# Altium PCB MiniRoverShield.PcbDoc
Units mm, origin at the board's own origin, x right, y up, seen from the top; angles counter-clockwise.
Board outline 152.4 x 101.6 mm, 2 copper layers (F.Cu, B.Cu); 33 components, 48 nets, 185 pads, 134 vias.
Unrouted connection lines stored in the file: 1.
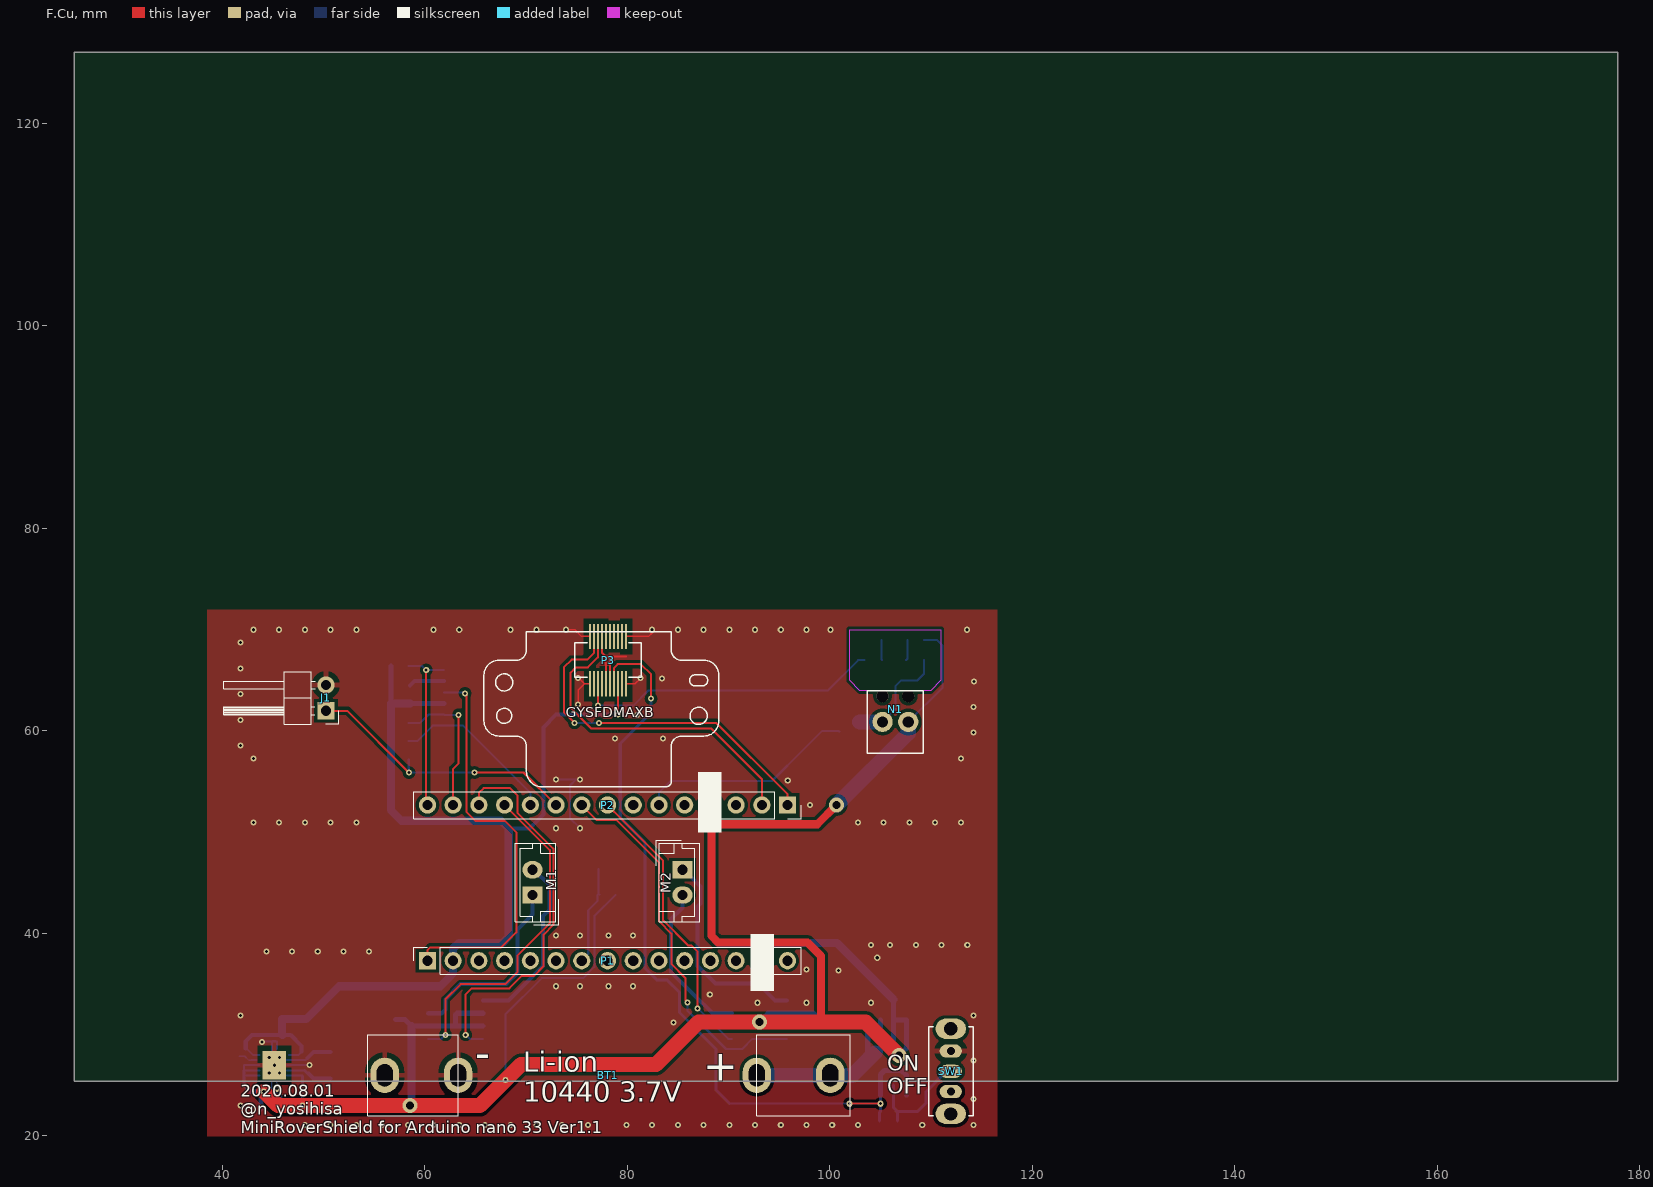
[diagram p0: F.Cu view]
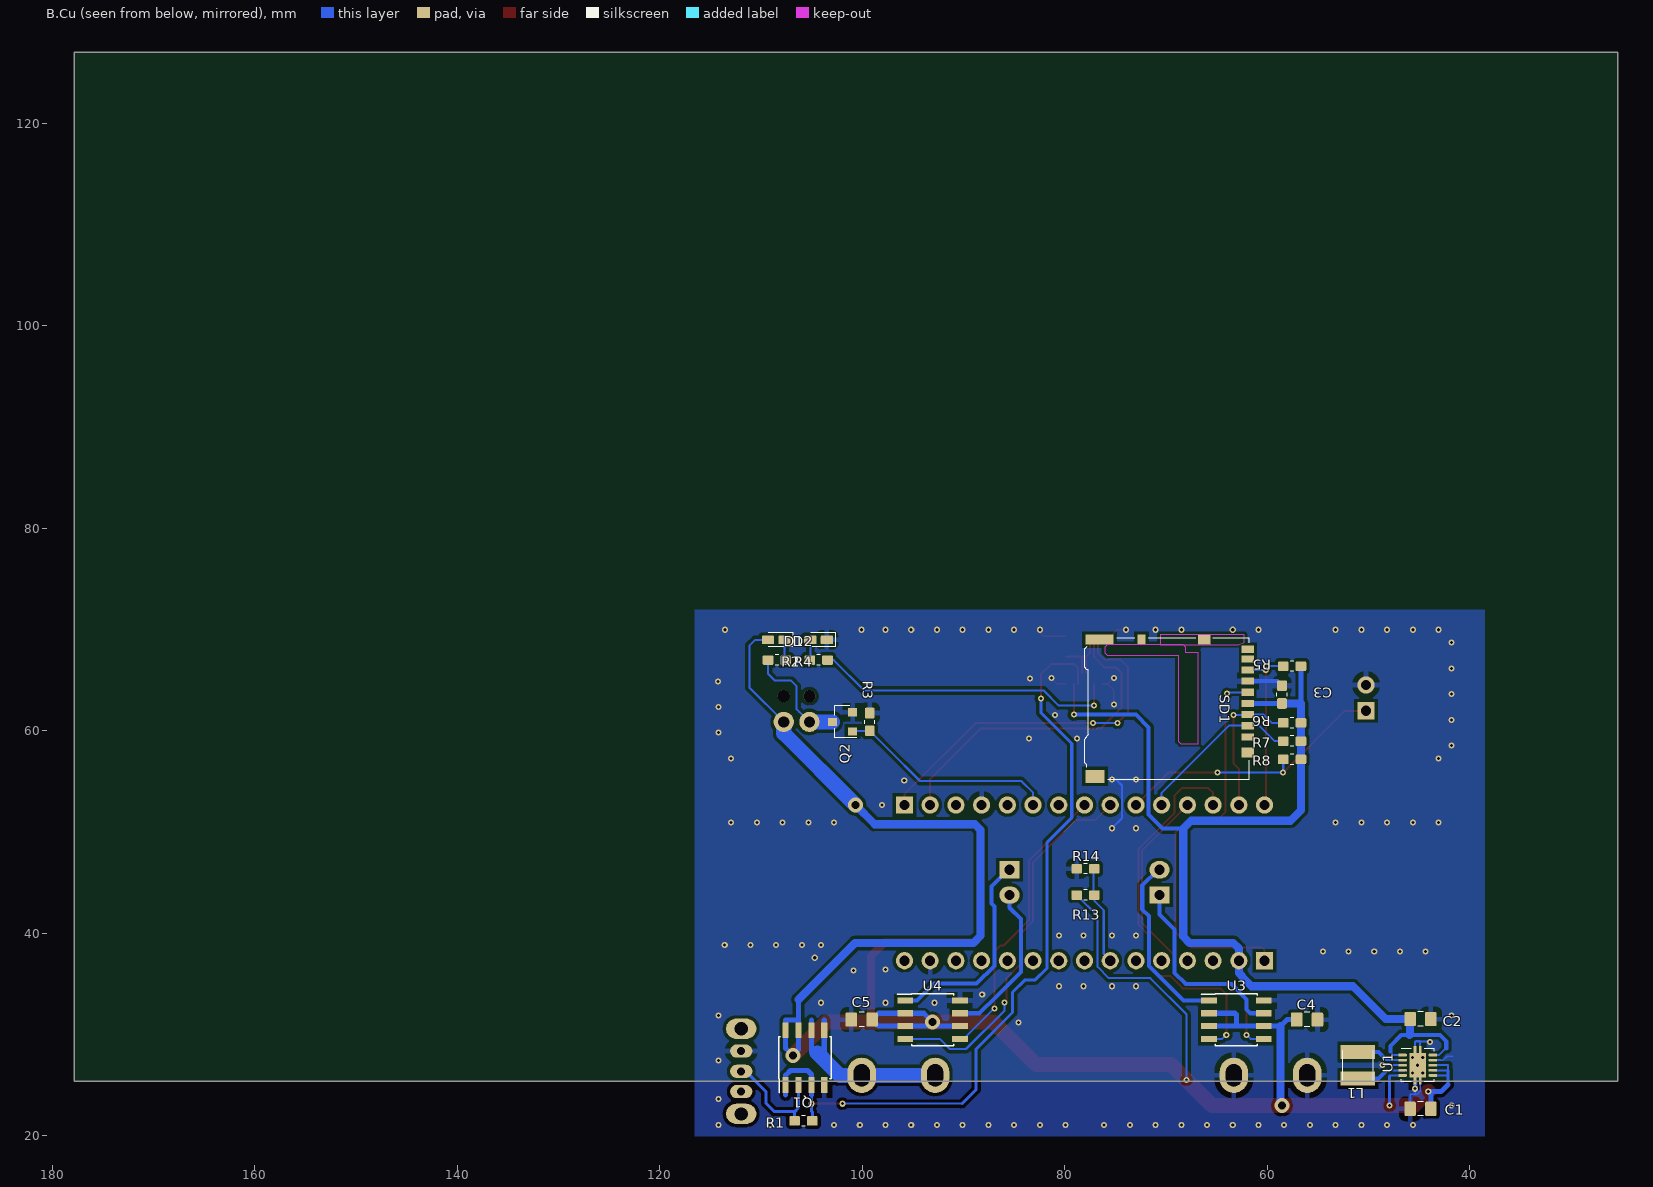
[diagram p1: B.Cu view, seen from below]

## Layer stack, top to bottom
F.Mask: solder mask 0.0102, Solder Resist, Dk 3.5
F.Cu: signal copper 0.0356
Dielectric 1: dielectric 0.32, FR-4, Dk 4.8
B.Cu: signal copper 0.0356
B.Mask: solder mask 0.0102, Solder Resist, Dk 3.5

## Board outline
25.4,25.4 177.8,25.4 177.8,127 25.4,127

## Design rules (kind name [scope] priority, off if disabled: settings)
Clearance "Clearence 0.3_NetClass" [InNetClass('Vbat')] p1: gap=0.3 ignorepadtopadclearanceinfootprint=FALSE
Clearance "Clearence 0.3_Polygon" [InNamedPolygon('B.Cu-GND') OR InNamedPolygon('F.Cu-GND')] p2: gap=0.3 ignorepadtopadclearanceinfootprint=FALSE
Clearance "Clearence 0.2_NetClass" [InNetClass('3.3V')] p3: gap=0.2 ignorepadtopadclearanceinfootprint=FALSE
Clearance "Clearence 0.1524_NetClass" [InNetClass('Default')] p4: gap=0.152 ignorepadtopadclearanceinfootprint=FALSE
HoleSize "Hole Size (Default)" [All] p1: absolutevalues=TRUE maxlimit=10 minlimit=0.3 maxpercent=80.000 minpercent=20.000
MinimumSolderMaskSliver [All] p1: minsoldermaskwidth=0
PolygonConnect Polygon_F.Cu-GND_ConnectDirect [IsNamedPolygon('F.Cu-GND') vs IsVia] p1: connectstyle=Direct reliefconductorwidth=0.254 reliefentries=4 polygonreliefangle="90 Angle" airgapwidth=0.254
PolygonConnect Polygon_F.Cu-GND_ConnectRelief45 [IsNamedPolygon('F.Cu-GND') vs (IsThruPin or IsSMTPin) and (PadShape_AllLayers = 'Round')] p2: connectstyle=Relief reliefconductorwidth=0.508 reliefentries=4 polygonreliefangle="45 Angle" airgapwidth=0.508
PolygonConnect Polygon_F.Cu-GND_ConnectRelief90 [IsNamedPolygon('F.Cu-GND') vs (IsThruPin or IsSMTPin) and (PadShape_AllLayers <> 'Round')] p3: connectstyle=Relief reliefconductorwidth=0.508 reliefentries=4 polygonreliefangle="90 Angle" airgapwidth=0.508
PolygonConnect Polygon_B.Cu-GND_ConnectDirect [IsNamedPolygon('B.Cu-GND') vs IsVia] p4: connectstyle=Direct reliefconductorwidth=0.254 reliefentries=4 polygonreliefangle="90 Angle" airgapwidth=0.254
PolygonConnect Polygon_B.Cu-GND_ConnectRelief45 [IsNamedPolygon('B.Cu-GND') vs (IsThruPin or IsSMTPin) and (PadShape_AllLayers = 'Round')] p5: connectstyle=Relief reliefconductorwidth=0.508 reliefentries=4 polygonreliefangle="45 Angle" airgapwidth=0.508
PolygonConnect Polygon_B.Cu-GND_ConnectRelief90 [IsNamedPolygon('B.Cu-GND') vs (IsThruPin or IsSMTPin) and (PadShape_AllLayers <> 'Round')] p6: connectstyle=Relief reliefconductorwidth=0.508 reliefentries=4 polygonreliefangle="90 Angle" airgapwidth=0.508
RoutingVias [All] p1: holewidth=0.711 width=1.27 viastyle="Through Hole" minholewidth=0.711 minwidth=1.27 maxholewidth=0.711 maxwidth=1.27
SilkToSilkClearance [All] p1: silktosilkclearance=0
SilkToSolderMaskClearance [IsPad] p1: minsilkscreentomaskgap=0 clearancetoexposedcopper=TRUE
SolderMaskExpansion [All] p1: expansion=0.102 istentingtop=FALSE
Width [All] p1: maxlimit=10 minlimit=0.152 preferedwidth=0.2 minimp=50.000000 maximp=50.000000 favimp=50.000000
26 further rules are at their usual default settings.

## Classes and differential pairs
net class Vbat: +VSW
net class 3.3V: +3V3
net class Default: +BATT Arduino←GPS Arduino→GPS CS flightPin GND MISO MOSI MotorL1 MotorL2 MotorR1 MotorR2 Net-(BT1-Pad1) Net-(D1-Pad2) Net-(D2-Pad1) Net-(L1-Pad1) Net-(L1-Pad2) Net-(M1-Pad1) Net-(M1-Pad2) Net-(M2-Pad1) Net-(M2-Pad2) Net-(N1-Pad2) Net-(P1-Pad3) Net-(P1-Pad4) Net-(P1-Pad5) Net-(P1-Pad6) Net-(P1-Pad8) Net-(P1-Pad9) Net-(P1-Pad10) Net-(P1-Pad11) Net-(P1-Pad12) Net-(P1-Pad13) Net-(P1-Pad15) Net-(P2-Pad3) Net-(P2-Pad5) Net-(P2-Pad7) Net-(P3-Pad4) Net-(P3-Pad6) Net-(Q1-Pad2) Net-(SD1-Pad1) Net-(SD1-Pad8) Net-(SD1-Pad9) Nichrome SCK Vbatt

## Components (designator, comment, footprint, x,y, rotation, side; value= is the part's Value field where it differs from the comment)
BT1 "Comment" BC-0402_AAA 92.8,25.98 r180 top
C1 "Comment" C_0805_2012Metric_Pad1.15x1.40mm_HandSolder 44.875,22.68 r180 bottom
C2 "Comment" C_0805_2012Metric_Pad1.15x1.40mm_HandSolder 44.875,31.53 r0 bottom
C3 "Comment" C_0603_1608Metric_Pad1.05x0.95mm_HandSolder 58.55,63.58 r270 bottom
C4 "Comment" C_0805_2012Metric_Pad1.15x1.40mm_HandSolder 56.075,31.48 r0 bottom
C5 "Comment" C_0805_2012Metric_Pad1.15x1.40mm_HandSolder 100.05,31.48 r180 bottom
D1 "Comment" LED_0603_1608Metric_Castellated 104.3,68.98 r180 bottom
D2 "Comment" LED_0603_1608Metric_Castellated 108.487,68.98 r180 bottom
J1 "Comment" PinHeader_1x02_P2.54mm_Horizontal 50.25,61.98 r180 top
L1 "Comment" TDK_VLS3012 51.054,26.978 r270 bottom
M1 "Comment" JST_EH_B02B-EH-A_1x02_P2.50mm_Vertical 70.65,43.78 r90 top
M2 "Comment" JST_EH_B02B-EH-A_1x02_P2.50mm_Vertical 85.45,46.28 r270 top
N1 "Comment" MPT0.5_2-2.54 109.25,63.98 r180 top
P1 "Comment" PinSocket_1x15_P2.54mm_Vertical 60.27,37.3 r90 top
P2 "Comment" PinSocket_1x15_P2.54mm_Vertical 95.83,52.67 r270 top
P3 "GYSFDMAXB" GYSFDMAXB 78.1,66.98 r180 top
Q1 "Comment" SOIC-8_3.9x4.9mm_P1.27mm 105.65,27.73 r270 bottom
Q2 "Comment" SOT-23 101.95,60.88 r180 bottom
R1 "Comment" R_0603_1608Metric_Pad1.05x0.95mm_HandSolder 105.8,21.48 r180 bottom
R2 "Comment" R_0603_1608Metric_Pad1.05x0.95mm_HandSolder 104.3,66.98 r180 bottom
R3 "Comment" R_0603_1608Metric_Pad1.05x0.95mm_HandSolder 99.25,60.88 r270 bottom
R4 "Comment" R_0603_1608Metric_Pad1.05x0.95mm_HandSolder 108.425,66.98 r180 bottom
R5 "Comment" R_0603_1608Metric_Pad1.05x0.95mm_HandSolder 57.55,66.38 r180 bottom
R6 "Comment" R_0603_1608Metric_Pad1.05x0.95mm_HandSolder 57.55,60.78 r180 bottom
R7 "Comment" R_0603_1608Metric_Pad1.05x0.95mm_HandSolder 57.55,58.98 r180 bottom
R8 "Comment" R_0603_1608Metric_Pad1.05x0.95mm_HandSolder 57.55,57.18 r180 bottom
R13 "Comment" R_0603_1608Metric_Pad1.05x0.95mm_HandSolder 77.95,43.78 r0 bottom
R14 "Comment" R_0603_1608Metric_Pad1.05x0.95mm_HandSolder 77.95,46.38 r180 bottom
SD1 "Comment" microSD_HC_Hirose_DM3AT-SF-PEJM5 69.65,62.18 r90 bottom
SW1 "Power" SS-12D01-VG4 111.95,26.38 r270 top
U1 "Comment" Texas_S-PVSON-N10_ThermalVias 45.15,26.98 r0 bottom
U3 "Comment" SOIC-8_3.9x4.9mm_P1.27mm 63.05,31.48 r0 bottom
U4 "Comment" SOIC-8_3.9x4.9mm_P1.27mm 93.05,31.48 r0 bottom

## Footprints (in the part's own frame and the unit in brackets; to place one, negate y for a bottom-side part, rotate by r counter-clockwise, add the part's x,y. Pads: shape width x height; smd on the part's side, far side on the other; paste and mask are expansions set on the pad)
BC-0402_AAA [mm]
  rrect100% 2.8x3.5 hole 2.2 slot 1.6 at 0 deg paste-3.5 mask+0: 1(-7.25,0) 1(0,0) 2(29.5,0) 2(36.75,0)
  silkscreen extent -9.2,-4 38.4,4
C_0603_1608Metric_Pad1.05x0.95mm_HandSolder [mm]
  rrect25% 1.05x0.95 smd paste-1.05 mask+0: 1(0.875,0) 2(-0.875,0)
  silkscreen extent -0.17,-0.51 0.17,0.51
C_0805_2012Metric_Pad1.15x1.40mm_HandSolder [mm]
  rrect22% 1.15x1.4 smd paste-1.4 mask+0: 1(1.025,0) 2(-1.025,0)
  silkscreen extent -0.26,-0.71 0.26,0.71
GYSFDMAXB [mm]
  rect 0.2x2.5 smd paste-2.5 mask+0: 1(1.8,-2.34) 2(1.8,2.34) 3(1.4,-2.34) 4(1.4,2.34) 5(1,-2.34) 6(1,2.34) 7(0.6,-2.34) 8(0.6,2.34) 9(0.2,-2.34) 10(0.2,2.34) 11(-0.2,-2.34) 12(-0.2,2.34) 13(-0.6,-2.34) 14(-0.6,2.34) 15(-1,-2.34) 16(-1,2.34) 17(-1.4,-2.34) 18(-1.4,2.34) 19(-1.8,-2.34) 20(-1.8,2.34)
  silkscreen extent -10.95,-2.8 12.25,12.5
JST_EH_B02B-EH-A_1x02_P2.50mm_Vertical [mm]
  rect 1.7x2 hole 1 paste-2 mask+0: 1(0,0)
  rrect100% 1.7x2 hole 1 paste-2 mask+0: 2(2.5,0)
  silkscreen extent -2.91,-2.61 5.11,1.71
LED_0603_1608Metric_Castellated [mm]
  rrect25% 1.225x0.85 smd paste-1.225 mask+0: 1(0.813,0) 2(-0.813,0)
  silkscreen extent -0.8,-0.68 1.69,0.68
microSD_HC_Hirose_DM3AT-SF-PEJM5 [mm]
  rect 0.7x1.2 smd paste-1.2 mask+0: 1(-2.775,-7.725) 2(-1.675,-7.725) 3(-0.575,-7.725) 4(0.525,-7.725) 5(1.625,-7.725) 6(2.725,-7.725) 7(3.825,-7.725) 8(4.925,-7.725) 9(5.875,-7.725)
  rect 1x0.8 smd paste-1 mask+0: 10(6.825,2.775)
  rect 1.3x1.9 smd paste-1.9 mask+0: 11(-6.675,7.375)
  rect 1x1.2 smd paste-1.2 mask+0: 11(-4.325,-7.725) 11(6.825,-3.425)
  rect 1x2.8 smd paste-2.8 mask+0: 11(6.825,6.925)
  silkscreen extent -6.99,-7.89 6.98,8.38
MPT0.5_2-2.54 [mm]
  round 2 hole 1.1 paste-2 mask+0: 1(1.5,3.1) 2(4.04,3.1)
  round 1.2 hole 1.2 paste-1.2 mask+0: Un1(1.5,0.56) Un2(4.04,0.56)
  silkscreen extent 0,0 5.54,6.2
PinHeader_1x02_P2.54mm_Horizontal [mm]
  rect 1.7x1.7 hole 1 paste-1.7 mask+0: 1(0,0)
  rrect100% 1.7x1.7 hole 1 paste-1.7 mask+0: 2(0,-2.54)
  silkscreen extent -1.27,-3.87 10.1,1.33
PinSocket_1x15_P2.54mm_Vertical [mm]
  rect 1.7x1.7 hole 1 paste-1.7 mask+0: 1(0,0)
  rrect100% 1.7x1.7 hole 1 paste-1.7 mask+0: 2(0,-2.54) 3(0,-5.08) 4(0,-7.62) 5(0,-10.16) 6(0,-12.7) 7(0,-15.24) 8(0,-17.78) 9(0,-20.32) 10(0,-22.86) 11(0,-25.4) 12(0,-27.94) 13(0,-30.48) 14(0,-33.02) 15(0,-35.56)
  silkscreen extent -1.33,-36.89 1.33,1.33
R_0603_1608Metric_Pad1.05x0.95mm_HandSolder [mm]
  rrect25% 1.05x0.95 smd paste-1.05 mask+0: 1(0.875,0) 2(-0.875,0)
  silkscreen extent -0.17,-0.51 0.17,0.51
SOIC-8_3.9x4.9mm_P1.27mm [mm]
  rect 1.55x0.6 smd paste-1.55 mask+0: 1(2.7,-1.905) 2(2.7,-0.635) 3(2.7,0.635) 4(2.7,1.905) 5(-2.7,1.905) 6(-2.7,0.635) 7(-2.7,-0.635) 8(-2.7,-1.905)
  silkscreen extent -2.07,-2.58 3.47,2.58
SOT-23 [mm]
  rect 0.9x0.8 smd paste-0.9 mask+0: 1(1,-0.95) 2(1,0.95) 3(-1,0)
  silkscreen extent -0.76,-1.58 1.4,1.58
SS-12D01-VG4 [mm]
  rrect100% 1.3x2.2 hole 0.8 paste-2.2 mask+0: 1(-2,0) 2(0,0) 3(2,0)
  rrect100% 2x3 hole 1.3 paste-3 mask+0: Un1(-4.2,0) Un2(4.2,0)
  silkscreen extent -4.4,-2.2 4.4,2.2
TDK_VLS3012 [mm]
  rect 1.4x3.4 smd paste-3.4 mask+0: 1(1.3,0) 2(-1.3,0)
  silkscreen extent -1.5,-1.5 1.5,1.5
Texas_S-PVSON-N10_ThermalVias [mm]
  rrect100% 0.85x0.28 smd paste-0.85 mask+0.07: 1(1.475,-1) 2(1.475,-0.5) 3(1.475,0) 4(1.475,0.5) 5(1.475,1) 6(-1.475,1) 7(-1.475,0.5) 8(-1.475,0) 9(-1.475,-0.5) 10(-1.475,-1)
  rect 0.28x0.28 smd paste-0.28 mask+0.07: 1(1.76,-1) 2(1.76,-0.5) 3(1.76,0) 4(1.76,0.5) 5(1.76,1) 6(-1.76,1) 7(-1.76,0.5) 8(-1.76,0) 9(-1.76,-0.5) 10(-1.76,-1)
  round 0.6 hole 0.3 paste-0.6 mask+0: 11(-0.5,-0.75) 11(-0.5,0.75) 11(0,0) 11(0.5,-0.75) 11(0.5,0.75)
  rect 0.68x1.05 smd paste-1.05 mask+0: 11(-0.45,-0.635) 11(-0.45,0.635) 11(0.45,-0.635) 11(0.45,0.635)
  rect 0.26x0.5 smd paste-0.5 mask+0: 11(-0.25,-1.63) 11(-0.25,1.63) 11(0.25,-1.63) 11(0.25,1.63)
  rect 0.28x0.7 smd paste-0.7 mask+0: 11(-0.25,-1.55) 11(-0.25,1.55) 11(0.25,-1.55) 11(0.25,1.55)
  rect 1.65x2.4 smd paste-2.4 mask+0: 11(0,0)
  rect 2.3x2.8 smd far side paste-2.8 mask-2.8: 11(0,0)
  silkscreen extent -1.63,-1.63 1.63,1.63

## Part data
BT1: library part BC-0402_AAA
C1 C2 C4 C5: library part C_0805_2012Metric_Pad1.15x1.40mm_HandSolder, "Capacitor SMD 0805 (2012 Metric), square (rectangular) end terminal, IPC_7351 nominal with elongated pad for handsoldering. (Body size source: https://docs.google.com/spreadsheets/d/1BsfQQcO9C6DZCsRaXUlFlo91Tg2WpOkGARC1WS5S8t0/edit?usp=sharing), generated with kicad-footprint-generator"
C3: library part C_0603_1608Metric_Pad1.05x0.95mm_HandSolder, "Capacitor SMD 0603 (1608 Metric), square (rectangular) end terminal, IPC_7351 nominal with elongated pad for handsoldering. (Body size source: http://www.tortai-tech.com/upload/download/2011102023233369053.pdf), generated with kicad-footprint-generator"
D1 D2: library part LED_0603_1608Metric_Castellated, "LED SMD 0603 (1608 Metric), castellated end terminal, IPC_7351 nominal, (Body size source: http://www.tortai-tech.com/upload/download/2011102023233369053.pdf), generated with kicad-footprint-generator"
J1: library part PinHeader_1x02_P2.54mm_Horizontal, "Through hole angled pin header, 1x02, 2.54mm pitch, 6mm pin length, single row"
L1: library part TDK_VLS3012
M1 M2: library part JST_EH_B02B-EH-A_1x02_P2.50mm_Vertical, "JST EH series connector, B02B-EH-A (http://www.jst-mfg.com/product/pdf/eng/eEH.pdf), generated with kicad-footprint-generator"
N1: library part MPT0.5_2-2.54
P1 P2: library part PinSocket_1x15_P2.54mm_Vertical, "Through hole straight socket strip, 1x15, 2.54mm pitch, single row (from Kicad 4.0.7), script generated"
Q1 U3 U4: library part SOIC-8_3.9x4.9mm_P1.27mm, "8-Lead Plastic Small Outline (SN) - Narrow, 3.90 mm Body [SOIC] (see Microchip Packaging Specification 00000049BS.pdf)"
Q2: library part SOT-23, "SOT-23, Standard"
R1 R2 R3 R4 R5 R6 R7 R8 R13 R14: library part R_0603_1608Metric_Pad1.05x0.95mm_HandSolder, "Resistor SMD 0603 (1608 Metric), square (rectangular) end terminal, IPC_7351 nominal with elongated pad for handsoldering. (Body size source: http://www.tortai-tech.com/upload/download/2011102023233369053.pdf), generated with kicad-footprint-generator"
SD1: library part microSD_HC_Hirose_DM3AT-SF-PEJM5, "Micro SD, SMD, right-angle, push-pull (https://www.hirose.com/product/en/download_file/key_name/DM3AT-SF-PEJM5/category/Drawing%20(2D)/doc_file_id/44099/?file_category_id=6&item_id=06090031000&is_series=)"
SW1: library part SS-12D01-VG4
U1: library part Texas_S-PVSON-N10_ThermalVias, "3x3mm Body, 0.5mm Pitch, S-PVSON-N10, DRC, http://www.ti.com/lit/ds/symlink/tps61201.pdf"

## Via types
v1: diameter 0.6, hole 0.3, F.Cu to B.Cu, tented both sides, 130 vias
v2: diameter 1.5, hole 0.8, F.Cu to B.Cu, tented both sides, 4 vias

## Nets (pads, with @x,y where several pads share a name; then routed paths per layer and width w, separated by ;. In a path a pad name is that pad's centre, name@x,y a point inside that pad or via, vN(x,y) a via of type N, cw(c..) or ccw(c..) an arc to the next point about the centre after c; other vN are vias at no path point)
+3V3: C2.1 C3.1 P1.2 P3.16 R5.1 R6.1 R7.1 R8.1 SD1.4 U1.1 U1.10 | length 107.4
  F.Cu w0.2: v1@79.095,61.598 v1(79.1,61.604) P3.16
  B.Cu w0.2: 42.328,28.641 42.389,28.641 43.05,27.98 U1.10@43.675,27.98 ; 45.9,30.499 C2.1 ; U1.1@46.625,27.98 47.509,27.98 47.853,28.324 47.853,28.959
  B.Cu w0.4: 42.328,28.641 42.328,29.34 42.963,29.975 45.948,29.975 46.773,29.975 47.853,28.895 47.853,28.324 ; 68.3,50.358 70.329,50.358 71.72,51.75 71.72,60.35 72.973,61.604 v1(79.1,61.604)
  B.Cu w0.5: 56.675,62.68 56.675,65.805 R5.1 ; C3.1@58.425,62.53 58.425,62.78 58.5,62.705 SD1.4
  B.Cu w0.8: 45.948,29.975 45.9,30.023 C2.1 48.3,31.53 51.55,34.78 61.55,34.78 62.492,35.722 62.492,35.78 62.81,36.098 P1.2 62.81,38.502 63.363,39.055 67.665,39.055 68.3,39.69 68.3,50.358 67.538,51.12 57.71,51.12 56.675,52.155 R7.1 R6.1 56.675,62.68 56.7,62.705 C3.1
+BATT: P3.14 Q1.1 Q1.3 R1.1 | length 79.6
  F.Cu w0.2: P3.14 78.7,66.22 79.056,66.576 81.354,66.576 82.35,65.58 v1(82.35,63.18) ; v1(101.95,23.18) v1(105.015,23.18)
  B.Cu w0.2: 90.15,23.18 v1(101.95,23.18)
  B.Cu w0.3: v1(82.35,63.18) 82.35,61.78 79.31,58.74 79.31,58.601 79.31,51.42 81.742,48.988 81.742,36.588 82.95,35.38 83.95,35.38 85.15,34.18 85.15,32.18 88.75,28.58 88.75,24.58 90.15,23.18 ; R1.1 104.925,22.341 105.015,22.431 v1(105.015,23.18) 105.015,24.03
  B.Cu w0.5: 105.015,24.03 Q1.3@105.015,25.405 ; Q1.3 105.015,25.821 105.015,26.075 105.41,26.47 107.086,26.47 107.555,26.001 Q1.1 ; 107.555,24.03 Q1.1@107.555,25.405
+VSW: C1.1 C4.1 C5.1 D2.2 N1.1 Q1.7 Q1.8 R13.1 U1.5 U1.6 U1.7 U1.8 U3.2 U3.3 U3.6 U4.2 U4.3 U4.6 | length 265.5
  F.Cu w0.8: 99.122,31.245 99.122,37.773 97.802,39.094 88.975,39.094 88.302,39.767 88.302,50.199 88.88,50.778 98.767,50.778 v2(100.672,52.683)
  F.Cu w1.5: v1(44.106,24.387) 45.503,22.99 v1(47.916,22.99) v2(58.55,22.99) 65.442,22.99 v1(67.982,25.53) 69.506,27.054 82.841,27.054 87.032,31.245 v2(93.05,31.245) 99.122,31.245 103.542,31.245 v2(106.844,27.943)
  B.Cu w0.2: 42.138,26.863 42.14,26.861 42.14,26.48 ; 42.138,26.99 42.392,26.99 42.879,26.99 ; 42.143,25.98 U1.6@43.675,25.98 ; U1.7@43.675,26.48 42.14,26.48 ; U1.8@43.675,26.99 42.14,26.99 42.14,26.48 ; U1.5@46.392,25.98 47.924,25.98 47.924,25.856 ; v1(67.982,25.53) 67.982,32.012 71.55,35.58 75.64,35.58 76.76,36.7 76.76,41.715 R13.1 ; N1.1 111.151,64.281 111.151,68.405 110.576,68.98 D2.2
  B.Cu w0.3: 42.14,25.083 42.14,25.983 ; 42.14,26.48 42.14,25.983 ; 42.143,25.98 42.14,25.983 ; v1@47.924,22.998 v1(47.916,22.99) 47.916,25.847 47.924,25.856
  B.Cu w0.5: 42.14,25.083 42.836,24.387 v1(44.106,24.387) 43.85,24.131 C1.1 ; C4.1 58.05,31.48 58.685,30.845 U3.6 63.05,30.845 ; U3.3 64.443,30.845 63.05,30.845 ; U3.2 63.185,32.115 63.05,31.98 63.05,30.845 ; U4.6 93.05,30.845 U4.3 98.39,30.845 C5.1 98.39,32.115 U4.2 93.92,32.115 v2(93.05,31.245) ; 106.285,33.455 106.285,31.43 ; v2@107.225,27.943 v2(106.844,27.943) ; 106.285,31.43 107.555,31.43 107.555,28.654 v2(106.844,27.943) ; 106.285,31.43 106.285,28.502 v2(106.844,27.943)
  B.Cu w0.8: v2(58.55,22.99) 58.685,23.125 58.685,30.845 ; v2(100.672,52.683) 98.767,50.778 88.88,50.778 88.302,50.199 88.302,39.767 89.026,39.043 100.697,39.043 106.285,33.455
  B.Cu w1.5: v2(100.672,52.683) 107.75,59.761 N1.1
Arduino←GPS: P2.2 P3.5 | length 33.2
  F.Cu w0.2: 75.881,60.76 75.881,60.785 ; P3.5 77.1,67.262 76.11,66.272 74.942,66.272 74.408,65.738 74.408,62.258 75.881,60.785 ; P2.2 93.29,55.24 88.297,60.233 76.434,60.233 75.881,60.785
Arduino→GPS: P2.1 P3.3 | length 36.1
  F.Cu w0.2: v1(74.789,60.785) 73.748,61.827 73.748,66.272 74.51,67.034 76.059,67.034 76.7,67.674 P3.3 ; v1(77.228,60.785) 86.143,60.785 88.765,60.785 95.83,53.72 P2.1
  B.Cu w0.2: v1(74.789,60.785) v1(77.228,60.785)
CS: P2.11 R7.2 SD1.2 | length 16.6
  B.Cu w0.2: R7.2 59.25,58.98 60.775,60.505 SD1.2 63.797,60.505 69.232,55.07 70.43,53.872 P2.11
flightPin: J1.1 P2.10 R8.2 | length 27.9
  F.Cu w0.2: J1.1 52.35,61.98 v1(58.45,55.88) ; v1(64.934,55.883) 69.757,55.883 P2.10
  B.Cu w0.2: R8.2 58.425,55.905 v1(58.45,55.88) 58.453,55.883 61.632,55.883 v1(64.934,55.883)
GND: BT1.2 C1.2 C2.2 C3.2 C4.2 C5.2 D1.1 J1.2 P1.14 P2.4 P3.1 P3.2 P3.7 P3.10 P3.12 P3.19 P3.20 Q1.4 Q2.2 R3.2 R14.2 SD1.6 SW1.1 U1.3 U1.9 U1.11 U3.8 U4.8 | length 50.2
  F.Cu w0.152: U1.11@44.65,26.23 44.65,26.48 U1.11@45.15,26.98 ; U1.11@44.65,27.73 44.65,27.48 U1.11@45.15,26.98 ; U1.11@45.65,27.73 45.15,27.23 U1.11@45.15,26.98 ; v1(73.95,69.98) 74.83,69.98 75.49,69.32 P3.1 ; v1(75.15,62.58) 75.15,64.02 75.77,64.64 ; v1(75.15,65.23) 75.18,65.23 75.77,64.64 ; P3.2 75.77,64.64 ; P3.20 80.77,64.64 81.3,65.17 v1(81.3,65.23) ; P3.19 82.09,69.32 82.46,69.69 v1(82.46,69.98)
  F.Cu w0.2: U1.11@45.15,26.98 45.15,26.73 U1.11@45.65,26.23 ; P3.7 77.5,67.734 77.901,67.333 ; P3.10@77.901,65.742 77.901,67.333 ; P3.12@78.299,65.736 78.299,67.327 ; 79.884,67.333 77.901,67.333
  B.Cu w0.152: 41.668,27.867 42.226,27.867 42.607,27.486 42.907,27.486 ; v1@43.941,29.373 v1(43.941,29.275) 44.898,29.373 45.358,29.373 45.401,29.33 45.401,29.034 45.4,29.032 U1.11@45.4,28.53 ; U1.11@44.9,25.43 44.9,24.928 44.901,24.927 44.901,24.435 45.219,24.118 45.429,24.118 ; U1.11@45.4,25.43 v1(45.4,24.661) 45.4,24.147 45.429,24.118 ; C1.2 45.9,24.054 45.836,24.118 45.429,24.118
  B.Cu w0.2: 42.907,27.486 U1.9@43.395,27.486 ; v1(43.941,29.275) 43.994,29.328 45.4,29.328 ; 44.898,29.373 44.9,29.372 U1.11@44.9,28.53 ; U1.11@44.9,28.61 44.9,27.23 U1.11@45.15,26.98 ; U1.11@45.4,28.61 45.4,29.328 ; 45.401,29.33 45.4,29.328 ; U1.3@46.392,26.99 47.924,26.99 v1@48.615,26.99 ; v1(72.95,55.18) v1(75.35,55.18) 74.926,55.18 74.35,54.604 74.35,51.38 v1(75.35,50.38)
  B.Cu w0.3: v1@48.615,26.99 v1(48.645,26.99)
  B.Cu w0.4: C3.2 59,64.905 SD1.6
  other v1: 45.63,21.085 48.17,21.085 50.71,21.085 53.25,21.085 55.79,21.085 58.33,21.085 60.87,21.085 63.41,21.085 65.95,21.085 68.49,21.085 71.03,21.085 73.57,21.085 76.11,21.085 79.92,21.085 82.46,21.085 85,21.085 87.54,21.085 90.08,21.085 92.62,21.085 95.16,21.085 97.7,21.085 100.24,21.085 102.78,21.085 109.13,21.085 114.21,21.085 41.82,22.99 114.21,23.625 114.21,27.435 84.55,31.18 41.82,31.88 114.21,31.88 92.874,33.15 97.7,33.15 104.05,33.15 88.15,33.98 72.95,34.78 75.35,34.78 78.15,34.78 80.55,34.78 100.875,36.325 97.7,36.452 104.685,37.595 44.36,38.23 46.9,38.23 49.44,38.23 51.98,38.23 54.52,38.23 104.05,38.865 105.955,38.865 108.495,38.865 111.035,38.865 113.575,38.865 72.95,39.78 75.35,39.78 78.15,39.78 80.55,39.78 72.95,50.38 43.09,50.93 45.63,50.93 48.17,50.93 50.71,50.93 53.25,50.93 102.78,50.93 105.32,50.93 107.86,50.93 110.4,50.93 112.94,50.93 98.05,52.68 95.85,55.08 43.09,57.28 112.94,57.28 41.82,58.55 78.8,59.23 83.55,59.23 114.21,59.82 41.82,61.09 80.95,61.58 114.21,62.36 41.82,63.63 114.25,64.88 83.45,65.18 41.82,66.17 41.82,68.71 43.09,69.98 45.63,69.98 48.17,69.98 50.71,69.98 53.25,69.98 60.87,69.98 63.41,69.98 68.49,69.98 71.03,69.98 85,69.98 87.54,69.98 90.08,69.98 92.62,69.98 95.16,69.98 97.7,69.98 100.05,69.98 113.55,69.98
MISO: P2.15 R5.2 SD1.7 | length 17
  F.Cu w0.2: v1(60.15,66.005) 60.15,65.556 60.15,52.79 P2.15
  B.Cu w0.2: R5.2 59.775,66.38 v1(60.15,66.005) 60.975,66.005 SD1.7
MOSI: P2.14 R6.2 SD1.3 | length 14.4
  F.Cu w0.2: P2.14 62.81,54.451 62.81,56.24 63.35,56.78 v1(63.35,61.58)
  B.Cu w0.2: R6.2 59.55,60.78 60.375,61.605 SD1.3 61.95,61.58 v1(63.35,61.58)
MotorL1: P2.13 U3.4 | length 38.9
  F.Cu w0.2: v1(64.05,29.98) 64.05,33.98 64.65,34.58 68.35,34.58 69.55,35.78 70.75,35.78 71.75,36.78 71.75,39.882 72.702,40.834 72.702,48.356 69.15,51.908 69.15,53.622 68.439,54.334 65.812,54.334 65.35,53.872 P2.13
  B.Cu w0.2: v1(64.05,29.98) 64.455,29.575 U3.4
MotorL2: P2.12 U3.5 | length 33.2
  F.Cu w0.2: v1(62.05,29.98) 62.05,33.48 63.55,34.98 67.95,34.98 69.15,36.18 69.15,37.78 72.35,40.98 72.35,48.21 P2.12
  B.Cu w0.2: U3.5 61.645,29.575 v1(62.05,29.98)
MotorR1: P2.9 U4.4 | length 37.5
  F.Cu w0.2: P2.9 77,51.18 78.95,51.18 83.15,46.98 83.15,41.18 84.35,39.98 84.35,36.988 85.75,35.588 85.75,33.38 v1(85.95,33.18)
  B.Cu w0.2: v1(85.95,33.18) 85.95,32.38 89.75,28.58 91.35,28.58 92.345,29.575 U4.4
MotorR2: P2.8 U4.5 | length 28.6
  F.Cu w0.2: P2.8 79.54,51.18 79.55,51.18 83.55,47.18 83.55,41.278 86.048,38.78 86.35,38.78 86.95,38.18 86.95,34.18 v1(86.95,32.593)
  B.Cu w0.2: v1(86.95,32.593) 89.968,29.575 U4.5
Net-(BT1-Pad1): BT1.1 Q1.5 Q1.6 | length 22
  B.Cu w0.5: 103.745,31.43 103.745,27.003 103.722,26.98 105.015,28.273 105.015,31.43
  B.Cu w1.5: BT1.1@92.8,25.98 100.05,25.98 102.214,25.98 103.214,26.98 104.431,28.197
Net-(D1-Pad2): D1.2 R2.2 | length 2
  B.Cu w0.2: D1.2 105.112,67.042 R2.2
Net-(D2-Pad1): D2.1 R4.1 | length 2.1
  B.Cu w0.2: R4.1 107.675,67.105 D2.1
Net-(L1-Pad1): L1.1 U1.4 | length 4.5
  B.Cu w0.2: U1.4@46.392,26.482 47.924,26.482 48.129,26.482 ; 48.424,26.187 48.432,26.196
  B.Cu w0.3: 48.129,26.482 48.432,26.196
  B.Cu w0.4: 48.524,26.175 49.021,25.678 L1.1@50.673,25.678
Net-(L1-Pad2): L1.2 U1.2 | length 4.6
  B.Cu w0.2: U1.2@46.392,27.498 47.924,27.498 48.234,27.498 48.424,27.689
  B.Cu w0.4: 48.424,27.689 49.013,28.278 L1.2@50.673,28.278
Net-(M1-Pad1): M1.1 U3.7 | length 19.3
  B.Cu w0.4: U3.7 61.685,32.115 62.05,32.48 62.05,33.48 63.55,34.98 68.05,34.98 69.15,36.08 69.15,40.364 70.65,41.863 M1.1
Net-(M1-Pad2): M1.2 U3.1 | length 17.9
  B.Cu w0.4: U3.1 68.295,33.385 71.69,36.781 71.69,41.72 72.35,42.38 72.35,44.73 70.8,46.28 M1.2
Net-(M2-Pad1): M2.1 U4.1 | length 20.7
  B.Cu w0.4: M2.1 85.6,46.28 87.235,44.645 87.235,42.954 86.93,42.65 86.93,36.8 88.693,35.038 92.922,35.038 94.575,33.385 U4.1
Net-(M2-Pad2): M2.2 U4.7 | length 15.8
  B.Cu w0.4: M2.2 85.45,42.53 84.332,41.412 84.332,36.18 86.732,33.78 86.75,33.78 88.415,32.115 U4.7
Net-(N1-Pad2): N1.2 Q2.3 R4.2 | length 11
  B.Cu w0.2: N1.2 106.21,61.88 106.226,61.88 106.478,62.131 106.478,64.417 107.011,64.951 108.611,64.951 109.3,65.64 R4.2
  B.Cu w1.5: Q2.3 N1.2
Net-(P1-Pad3): P1.3
Net-(P1-Pad4): P1.4
Net-(P1-Pad5): P1.5
Net-(P1-Pad6): P1.6
Net-(P1-Pad8): P1.8
Net-(P1-Pad9): P1.9
Net-(P1-Pad10): P1.10
Net-(P1-Pad11): P1.11
Net-(P1-Pad12): P1.12
Net-(P1-Pad13): P1.13
Net-(P1-Pad15): P1.15
Net-(P2-Pad3): P2.3
Net-(P2-Pad5): P2.5
Net-(P2-Pad7): P2.7
Net-(P3-Pad4): P3.4
Net-(P3-Pad6): P3.6 R2.1 | length 30.3
  F.Cu w0.2: v1(77.101,62.487) P3.6@77.101,64.639
  B.Cu w0.2: v1(77.101,62.487) 80.58,62.487 82.073,63.98 99.8,63.98 102.8,66.98 R2.1
Net-(Q1-Pad2): Q1.2 R1.2 SW1.2 | length 11.3
  B.Cu w0.3: Q1.2 106.285,24.03 106.285,22.787 106.675,22.397 ; R1.2 106.675,22.397 ; SW1.2 111.5,26.38 109.511,24.391 109.511,23.244 108.664,22.397 106.675,22.397
Net-(SD1-Pad1): SD1.1
Net-(SD1-Pad8): SD1.8
Net-(SD1-Pad9): SD1.9
Nichrome: P2.6 Q2.1 R3.1 | length 21.6
  B.Cu w0.2: P2.6 83.13,53.872 84.303,55.045 94.29,55.045 97.446,58.201 R3.1 100.875,60.005 Q2.1
SCK: P1.1 SD1.5 | length 40.2
  F.Cu w0.2: P1.1 60.27,38.35 60.531,38.611 67.55,38.611 69.049,40.11 69.049,49.965 67.893,51.12 67.017,51.12 ; v1(63.982,63.693) 64.109,63.566 64.109,52.009 64.998,51.12 67.017,51.12 ; 67.157,51.12 67.017,51.12
  B.Cu w0.2: SD1.5 63.87,63.805 v1(63.982,63.693)
Vbatt: P1.7 R13.2 R14.1 | length 9.7
  B.Cu w0.2: P1.7 75.51,37.34 76.15,37.98 76.15,42.28 77.075,43.205 R13.2 ; R14.1@77.165,46.358 77.165,43.92 R13.2@77.267,43.818
"": 
pads on no net: N1.Un1 N1.Un2 P3.8 P3.9 P3.11 P3.13 P3.15 P3.17 P3.18 SD1.10 SD1.11 SW1.3 SW1.Un1 SW1.Un2

## Polygon pours and split planes (outlines as drawn)
GND on B.Cu "B.Cu-GND" (solid, remove dead copper, pour order 0): 38.55,71.98 38.55,19.98 116.55,19.98 116.55,71.98
GND on F.Cu "F.Cu-GND" (solid, remove dead copper, pour order 1): 38.55,71.98 38.55,19.98 116.55,19.98 116.55,71.98

## Keep-outs
F.Cu:
  region: 110.964,64.98 109.964,63.98 102.964,63.98 101.964,64.98 101.964,69.98 110.964,69.98
B.Cu:
  region: 70.55,68.48 62.8,68.48 62.3,68.73 62.3,69.48 70.55,69.48
  region: 76.05,68.23 76.05,67.73 75.8,67.48 68.8,67.48 68.8,58.98 68.55,58.73 66.8,58.73 66.8,67.73 68.05,67.73 68.05,68.23 68.3,68.48 75.8,68.48

## Silkscreen, mask and mechanical layers (free items; w line width, h text height)
F.SilkS:
  region: 89.281,49.965 86.995,49.965 86.995,55.934 89.281,55.934
  region: 94.488,34.344 92.202,34.344 92.202,39.932 94.488,39.932
  text "-" at 65.015,26.73 h3
  text "+" at 87.515,25.445 h3
  text "ON / OFF" at 105.679,24.17 h1.5
  text "Li-ion / 10440 3.7V" at 69.714,23.353 h2
  text "2020.08.01 / @n_yosihisa / MiniRoverShield for Arduino nano 33 Ver1.1" at 41.82,20.267 h1.2
Edge.Cuts:
  circle w0.1: c78.05,22.48 r1.1
  circle w0.1: c78.05,30.48 r1.1
  circle w0.1: c44.046,53.983 r1.1
  circle w0.1: c107.046,53.983 r1.1
  circle w0.1: c49.046,35.983 r1.1
  circle w0.1: c112.046,35.983 r1.1
  circle w0.1: c49.046,53.983 r1.1
  circle w0.1: c112.046,53.983 r1.1
  circle w0.1: c44.046,35.983 r1.1
  circle w0.1: c107.046,35.983 r1.1
  circle w0.1: c96.05,67.48 r0.75
  circle w0.1: c99.55,67.48 r0.707
  circle w0.1: c113.05,67.48 r0.75
  lines w0.1: 40.549,68.983 cw(c42.546,68.983) 42.55,70.98 ; 42.546,19.983 cw(c42.546,21.983) 40.546,21.983 ; 40.546,21.983 76.55,19.98 79.55,19.98 113.55,19.98 ; 40.546,21.983 40.546,32.983 41.546,32.983 41.546,39.983 66.946,39.983 66.946,49.983 41.546,49.983 41.546,56.983 40.546,56.983 42.55,70.98 ; 42.55,70.98 113.5,70.979 cw(c113.546,68.976) 115.55,68.973 115.546,56.983 114.546,56.983 114.546,49.983 89.146,49.983 89.146,39.983 114.546,39.983 114.546,32.983 115.546,32.983 113.55,19.98 ; 113.55,19.98 ccw(c113.546,21.983) 115.549,21.983 113.55,19.98

## Text inside footprints (layer, text, board x,y; h text height)
SD1: Cmts.User "KEEPOUT" at 70.148,67.565 h0.6; Cmts.User "KEEPOUT" at 64.523,68.64 h0.6; Cmts.User "KEEPOUT" at 77.56,56.729 h0.4 r90; Cmts.User "KEEPOUT" at 68.325,60.177 h1 r90